# EAGLE board brain_rev_2 (EAGLE 6.3)
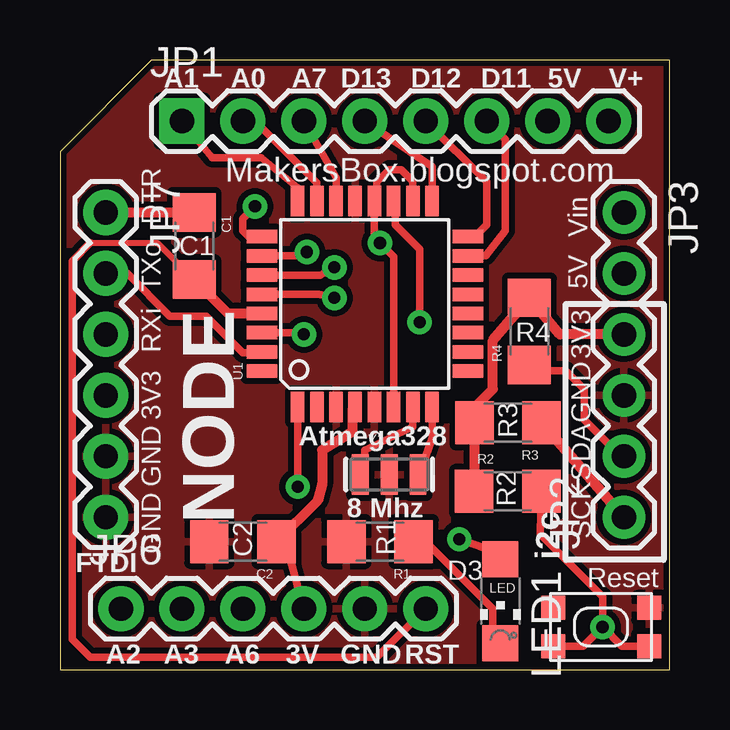
[diagram p0: board, top side]
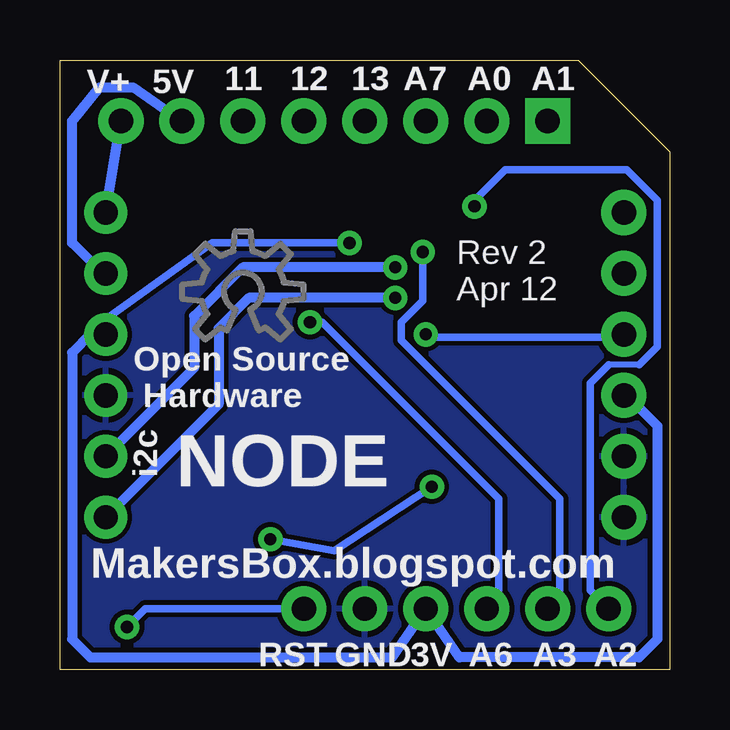
[diagram p1: board, bottom side, seen from below]

Size 25.4 x 25.4 mm. Coordinates in mm from the lower left corner, seen from the top.
Outline: 25.4,25.4 25.4,21.59 25.4,0 24.77,0 20.96,0 0,0 0,21.59
Outline: 25.4,25.4 3.81,25.4 0,21.59
Outline: 0,21.59 0,21.59
Copper layers (1*16): Top 0.035mm / dielectric 1.5mm / Bottom 0.035mm
Design rules "SparkFun": minimum track width 8mil, minimum drill 20mil, track to track 8mil, track to pad 8mil, pad to pad 8mil, via to via 8mil, smd to smd 8mil, copper to edge 10mil, drill to drill 8mil, minimum pad ring 12mil, minimum via ring 10mil, stop-mask expansion 4mil, vias tented up to drill 25mil, thermal gap 10mil
Net classes: 0 default: width 0.203 mm; 1 vcc: width 0.254 mm

## Footprints (pad centres in the part's own frame; a part is rotated, then mirrored left to right if it is on the bottom)
1206 = smd 1.6 x 1.8: 1 -1.4,0; 2 1.4,0
1X08 = drill 1.016 pad 1.88 square: 1 0,0 | drill 1.016 pad 1.88: 2 2.54,0; 3 5.08,0; 4 7.62,0; 5 10.16,0; 6 12.7,0; 7 15.24,0; 8 17.78,0
1X04 = drill 1.016 pad 1.778: 1 0,0; 2 2.54,0; 3 5.08,0; 4 7.62,0
1X02 = drill 1.016 pad 1.778: 1 0,0; 2 2.54,0
1X06 = drill 1.016 pad 1.88: 1 0,0; 2 2.54,0; 3 5.08,0; 4 7.62,0; 5 10.16,0; 6 12.7,0
CHIPLED_1206 = smd 1.5 x 1.5: A 0,-1.75; C 0,1.75
KMR2 = smd 1 x 1: 1 2,0.8; 2 2,-0.8; 3 -2,0.8; 4 -2,-0.8
TQFP32-08 = smd 1.27 x 0.559: 1 -4.293,2.8; 2 -4.293,2; 3 -4.293,1.2; 4 -4.293,0.4; 5 -4.293,-0.4; 6 -4.293,-1.2; 7 -4.293,-2; 8 -4.293,-2.8; 17 4.293,-2.8; 18 4.293,-2; 19 4.293,-1.2; 20 4.293,-0.4; 21 4.293,0.4; 22 4.293,1.2; 23 4.293,2; 24 4.293,2.8 | smd 0.559 x 1.27: 9 -2.8,-4.293; 10 -2,-4.293; 11 -1.2,-4.293; 12 -0.4,-4.293; 13 0.4,-4.293; 14 1.2,-4.293; 15 2,-4.293; 16 2.8,-4.293; 25 2.8,4.293; 26 2,4.293; 27 1.2,4.293; 28 0.4,4.293; 29 -0.4,4.293; 30 -1.2,4.293; 31 -2,4.293; 32 -2.8,4.293
RESONATOR-SMD = smd 0.7 x 1.7: 1 -1.2,0; 2 0,0; 3 1.2,0

## Placement (x,y rotation side)
C1  [1206]  5.59,17.65 270 top
C2  [1206]  7.62,5.33 180 top
JP1  [1X08]  5.08,22.86 0 top
JP2  [1X04]  23.5,6.35 90 top
JP3  [1X02]  23.5,19.05 270 top
JP6  [1X06]  2.54,2.54 0 top
JP7  FTDI Basic  [1X06]  1.91,19.05 270 top
LED1  [CHIPLED_1206]  18.35,2.86 180 top
R1  [1206]  13.34,5.33 180 top
R2  [1206]  18.66,7.43 0 top
R3  [1206]  18.67,10.29 180 top
R4  [1206]  19.56,14.1 90 top
SW1  SPST_TACT-KMR2  [KMR2]  22.54,1.78 0 top
U1  ATMEGA168  [TQFP32-08]  12.7,15.24 90 top
U$1  [OSHWLOGO_BOTTOM]  17.78,15.75 0 top
Y1  RESONATORSMD  [RESONATOR-SMD]  13.72,8.13 0 top

## Library data of the parts
C1 C2 JP1 JP6 JP7 R1-R4 U1 Y1 = SparkFun
JP2 JP3 = SparkFun_mod
LED1 SW1 = adafruit
U$1 = adafruit_mod

## Nets
+3V3: C2.1 JP2.4 JP6.4 JP7.4 R2.1 R3.2 R4.2 U1.4 U1.6 U1.18 U1.20
+5V: JP1.7 JP3.2
A0: JP1.2 U1.23
A1: JP1.1 U1.24
A2: JP6.1 U1.25
A3: JP6.2 U1.26
A6: JP6.3 U1.19
A7: JP1.3 U1.22
D2: U1.32
D3: LED1.A U1.1
D4: U1.2
D5: U1.9
D6: U1.10
D7: U1.11
D8: U1.12
D9: U1.13
D10: U1.14
D11: JP1.6 U1.15
D12: JP1.5 U1.16
D13: JP1.4 U1.17
DTR: C1.1 JP7.1
GND: C2.2 JP2.3 JP6.5 JP7.5 JP7.6 R1.2 SW1.1 U1.3 U1.5 U1.21 Y1.2
N$1: U1.8 Y1.3
N$3: U1.7 Y1.1
N$4: LED1.C R1.1
RESET: C1.2 JP6.6 R2.2 SW1.2 SW1.4 U1.29
RXI: JP7.3 U1.30
SCL_A5: JP2.1 R3.1 U1.28
SDA_A4: JP2.2 R4.1 U1.27
TXO: JP7.2 U1.31
V+: JP1.8 JP3.1

## Tracks (layer width: path | path; a pad name or v marks a point on that pad's centre or on a via)
+3V3  (via drill 0.51 pad 0.25)
  Top 0.305: JP6.4 9.53,4.83 C2.1 | U1.18 14.7,20.35 14.22,20.83 13.72,20.83 13.21,20.32 13.21,19.64 U1.20 13.1,18.02 v13.34,17.78 13.9,17.21 U1.6 | 12.19,10.41 12.19,11.05 U1.4
  Top 0.406: U1.4 12.19,10.84 12.19,10.41 12.19,9.91 10.92,9.14 10.92,7.74 10.73,7.05 C2.1 | JP2.4 20.83,13.97 R4.2 18.03,13.72 18.03,11.68 17.02,10.66 R3.2 17.27,7.44 R2.1
  Bottom 0.305: v13.34,17.78 19.05,17.78 23.5,14.61 JP2.4
  Bottom 0.406: JP7.4 1.78,11.43 0.51,10.16 0.51,1.27 1.27,0.51 8.76,0.51 JP6.4 11.56,0.51 24.13,0.51 24.89,1.27 24.89,13.21 24.13,13.97 JP2.4
+5V
  Bottom 0.406: JP3.2 23.62,16.51 24.89,17.78 24.89,22.86 23.75,24.26 22.35,24.26 JP1.7
A0
  Top 0.305: U1.23 10.7,20.29 8.13,22.86 JP1.2
A1
  Top 0.305: U1.24 9.9,20.07 8.38,21.34 6.35,21.34 JP1.1
A2  (via drill 0.51 pad 0.25)
  Top 0.305: U1.25 7.87,18.04 7.62,18.29 7.62,18.8 v8.13,19.3
  Bottom 0.254: 1.27,12.7 2.54,12.7
  Bottom 0.305: v8.13,19.3 8.13,19.56 6.86,20.83 1.78,20.83 0.51,19.56 0.51,13.46 1.27,12.7 | 2.54,12.7 3.3,11.94 3.3,3.3 JP6.1
A3  (via drill 0.51 pad 0.25)
  Top 0.305: U1.26 10.13,17.24 v10.29,17.4
  Bottom 0.305: v10.29,17.4 10.29,15.37 11.18,14.48 11.18,13.72 4.57,7.11 4.57,3.3 JP6.2
A6  (via drill 0.51 pad 0.25)
  Top 0.305: v14.99,14.48 14.99,17.53 13.97,18.54 13.97,19.46 U1.19
  Bottom 0.305: v14.99,14.48 14.48,14.48 7.11,7.11 7.11,3.3 JP6.3
A7
  Top 0.305: U1.22 11.5,20.5 JP1.3
D3  (via drill 0.51)
  Top 0.305: LED1.A 18.25,4.86 v16.64,5.44 | U1.1 9.9,8.39 v9.91,7.62
  Bottom 0.305: v16.64,5.44 13.97,4.95 v9.91,7.62
D11
  Top 0.305: U1.15 17.75,17.24 18.54,18.29 18.54,22.1 JP1.6
D12
  Top 0.305: U1.16 17.28,18.04 17.78,18.54 17.78,20.32 JP1.5
D13
  Top 0.305: U1.17 15.5,20.95 JP1.4
DTR
  Top 0.406: JP7.1 C1.1
GND
  pour Bottom: -1.27,26.67 26.67,26.67 26.67,-1.27 -1.27,-1.27
  pour Top (isolate 0.254): -0.64,26.04 26.67,26.04 26.67,0 26.04,-0.64 -0.64,-0.64
N$1
  Top 0.305: U1.8 15.5,9.66 15.24,8.89 15.24,8.2 Y1.3
N$3
  Top 0.305: U1.7 14.7,10.13 12.7,9.14 12.7,8.71 Y1.1
N$4
  Top 0.305: R1.1 15.24,5.33 18.03,2.54 18.03,1.17 LED1.C
RESET  (via drill 0.51)
  Top 0.254: 1.27,17.78 4.06,17.78 C1.2
  Top 0.305: JP6.6 13.21,0.51 1.27,0.51 0.51,1.27 0.51,17.02 1.27,17.78 | SW1.2 23.41,0.98 v22.61,1.78 | SW1.4 21.81,0.98 v22.61,1.78 | R2.2 20.01,5.65 22.61,3.05 v22.61,1.78
  Top 0.406: U1.29 7,14.84 C1.2
  Bottom 0.305: JP6.6 21.84,2.54 v22.61,1.78
RXI  (via drill 0.51 pad 0.25)
  Top 0.305: U1.30 10.09,14.04 v10.16,13.97
  Bottom 0.305: JP7.3 1.91,13.84 10.03,13.84 v10.16,13.97
SCL_A5  (via drill 0.51 pad 0.25)
  Top 0.305: U1.28 10.78,15.64 v11.43,15.49
  Top 0.406: R3.1 JP2.1
  Bottom 0.406: v11.43,15.49 17.53,15.49 18.8,14.22 18.8,11.05 JP2.1
SDA_A4  (via drill 0.51 pad 0.25)
  Top 0.305: U1.27 10.85,16.44 v11.43,16.76 | JP2.2 23.37,8.89 21.84,10.41 21.84,11.68 21.08,12.45 19.55,12.45 R4.1
  Bottom 0.406: v11.43,16.76 17.78,16.76 19.81,14.73 19.81,12.57 JP2.2
TXO
  Top 0.305: JP7.2 2.79,16.51 4.57,14.73 6.1,14.73 7.62,13.21 8.38,13.21 U1.31
V+
  Bottom 0.406: JP3.1 JP1.8

## Text on the board
tPlace: A1 | A0 | A7 | D13 | D12 | D11 | 5V | V+ | MakersBox.blogspot.com | DTR | Vin | C1 | TXo | 5V | NODE | R4 | RXi | 3V3 | 3V3 | Atmega328 | R3 | GND | GND | SDA | R2 | i2c | 8 Mhz | GND | C2 | R1 | SCK | FTDI | D3 | LED | Reset | A2 | A3 | A6 | 3V | GND | RST
bPlace: A1 | A0 | A7 | 13 | 12 | 5V | V+ | 11 | Rev 2 / Apr 12 | Open Source / Hardware | i2c | NODE | MakersBox.blogspot.com | A2 | A3 | A6 | 3V | GND | RST